# Altium PCB iotv4.PcbDoc
Units mm, origin at the board's own origin, x right, y up, seen from the top; angles counter-clockwise.
Board outline 151 x 86.38 mm, 2 copper layers (Top Layer, Bottom Layer); 125 components, 112 nets, 435 pads, 0 vias.
Unrouted connection lines stored in the file: 10.
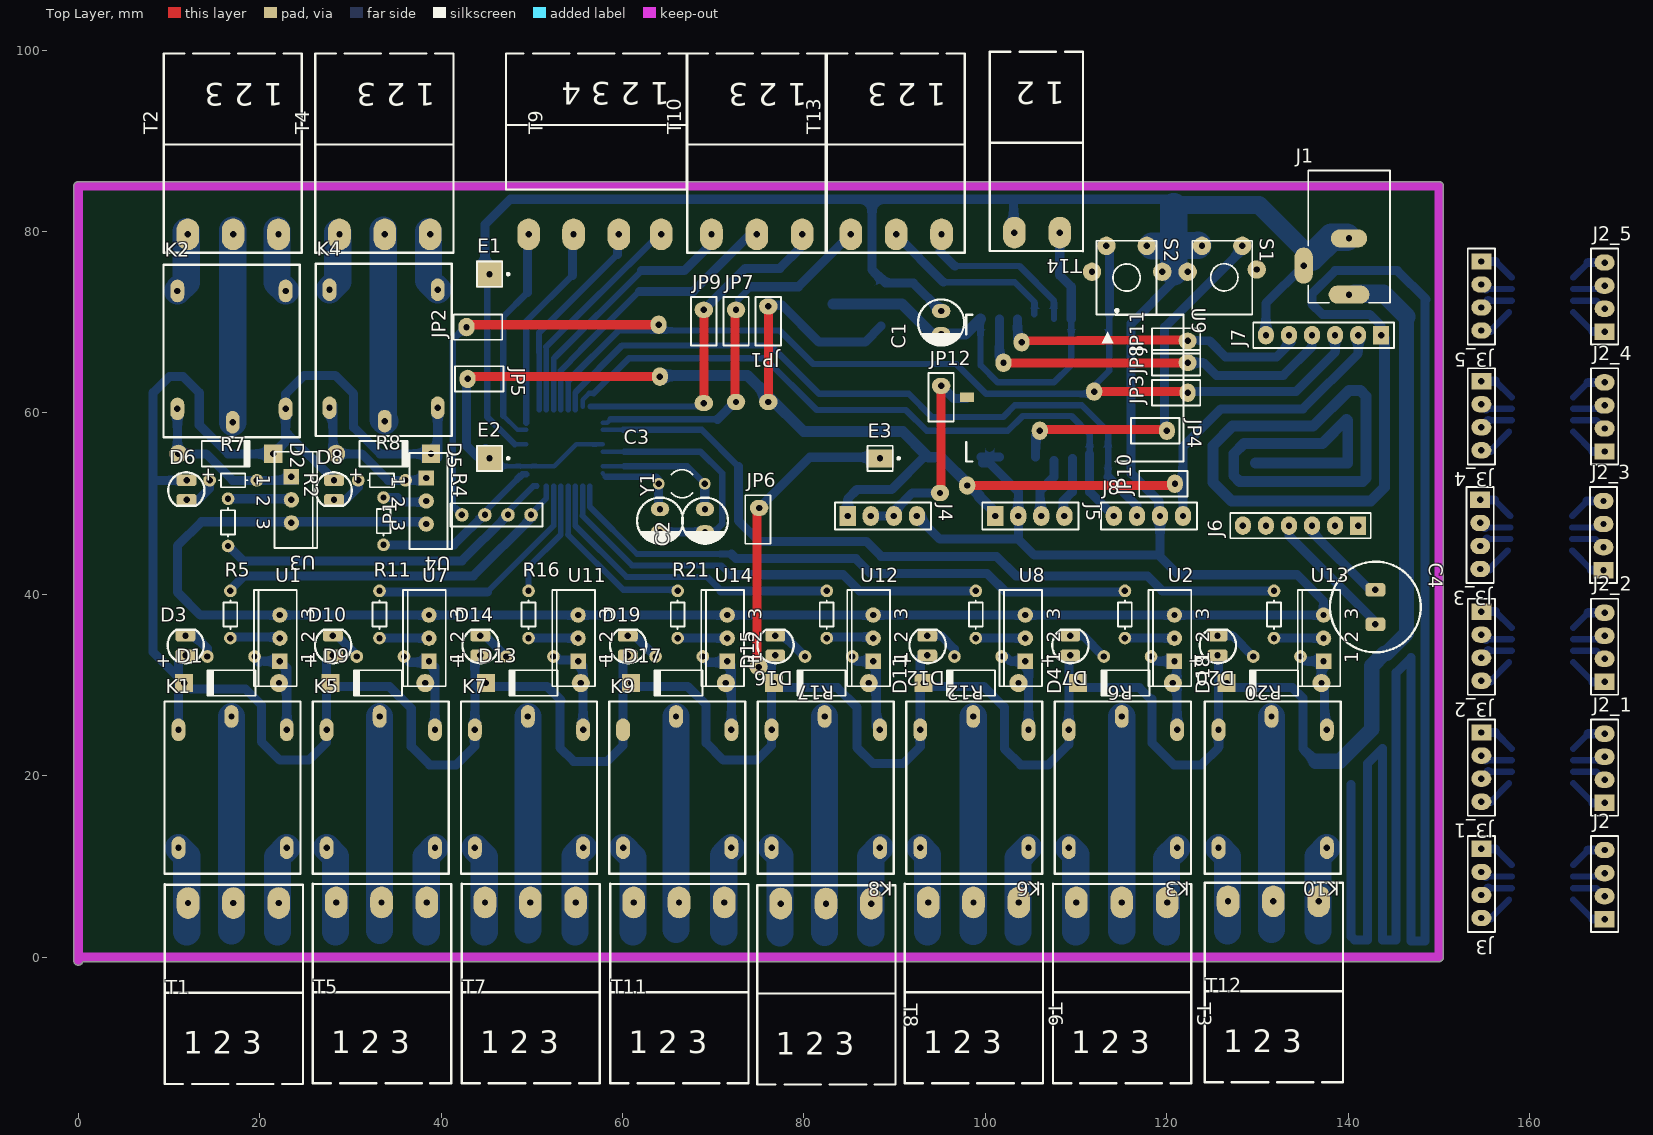
[diagram p0: Top Layer view]
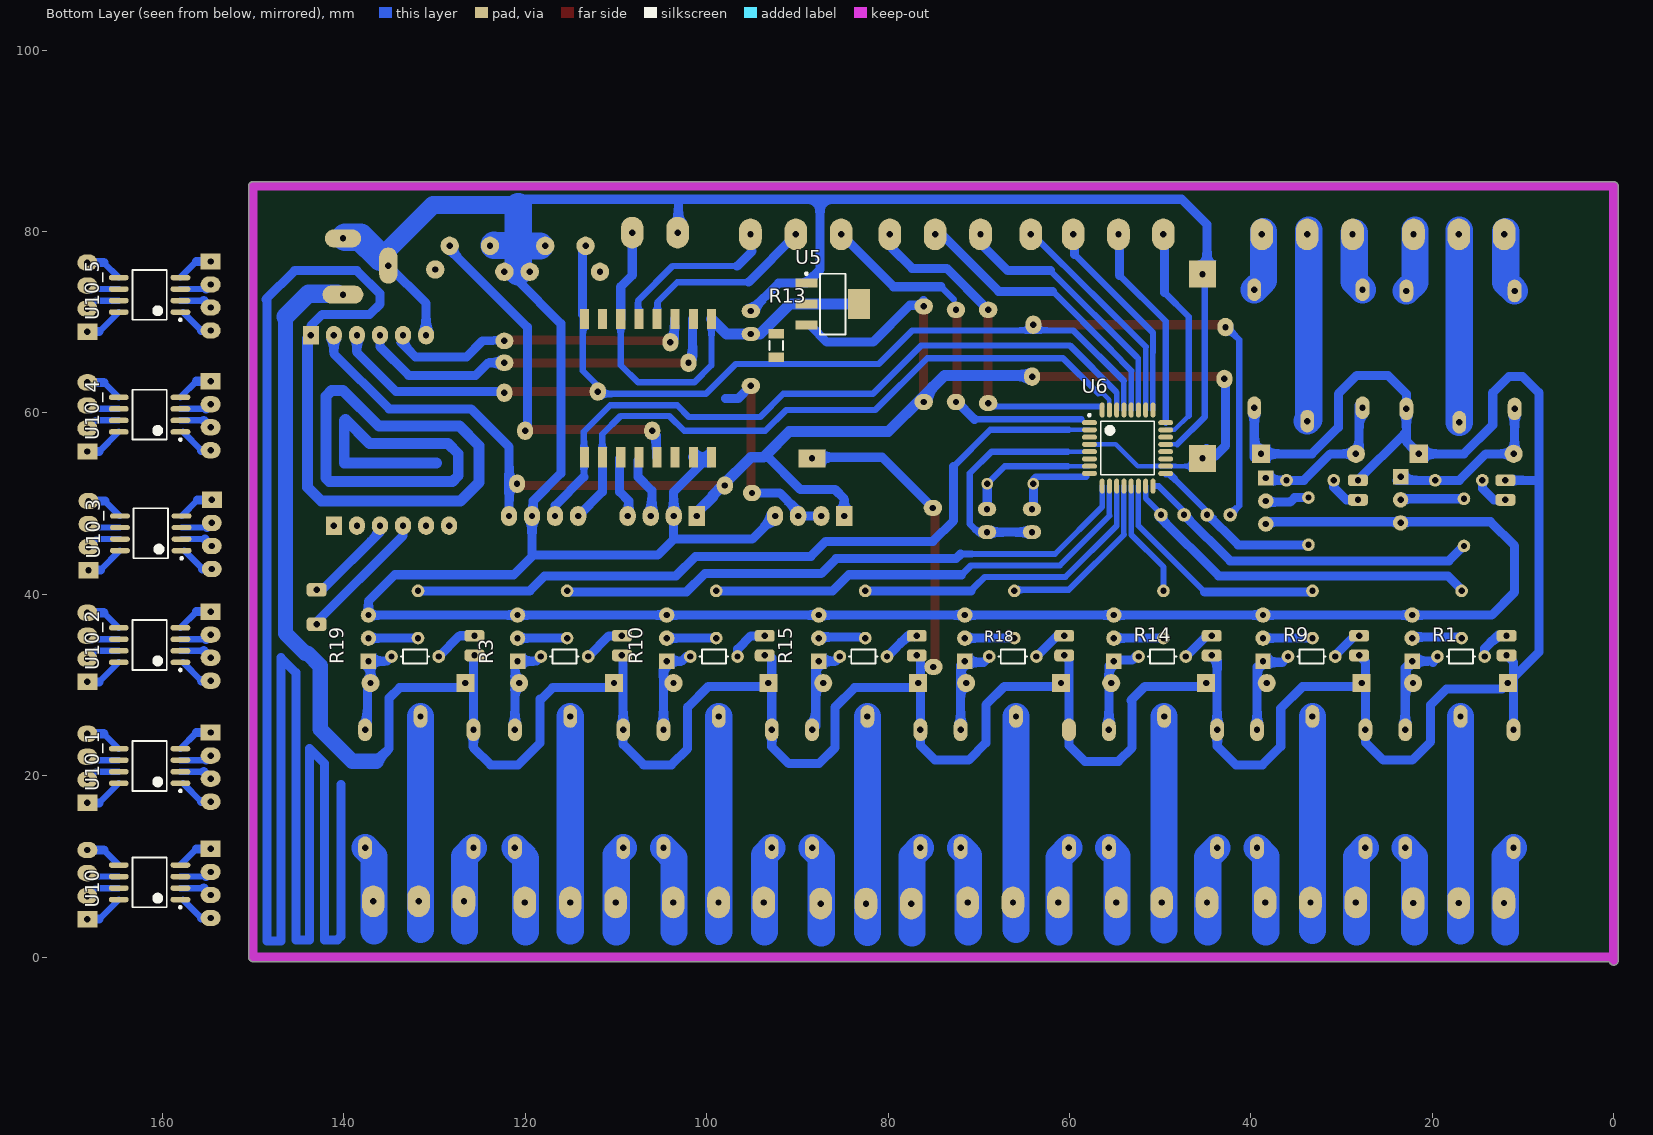
[diagram p1: Bottom Layer view, seen from below]

## Layer stack, top to bottom
Top Solder: solder mask 0.0102, Solder Resist, Dk 3.5
Top Layer: signal copper 0.0356
Dielectric 1: dielectric 0.32, FR-4, Dk 4.8
Bottom Layer: signal copper 0.0356
Bottom Solder: solder mask 0.0102, Solder Resist, Dk 3.5

## Board outline
-0.5,-0.381 -0.5,85 cw(c0,85) 0,85.5 150,85.5 cw(c150,85) 150.5,85 150.5,0 cw(c150,0) 150,-0.5 0.486,-0.5 cw(c0,-0.381)

## Design rules (kind name [scope] priority, off if disabled: settings)
Clearance Clearance_1 [InPolygon] p1: gap=0.8 ignorepadtopadclearanceinfootprint=FALSE
Clearance [All] p2: gap=0.254 ignorepadtopadclearanceinfootprint=FALSE except(0: Arc-Hole Track-Hole SMDPad-Hole THPad-Hole Via-Hole Fill-Hole Poly-Hole Region-Hole Text-Hole)
PolygonConnect [All] p1: connectstyle=Relief reliefconductorwidth=0.254 reliefentries=4 polygonreliefangle="90 Angle" airgapwidth=0.254
RoomDefinition iotv4 [InComponentClass('iotv4')] p1: confinementstyle=ConfineIn formatcopy=TRUE lockcomponents=FALSE outline 144.907,-4.953 247.904,-4.953 247.904,23.114 144.907,23.114
RoutingLayers [All] p1: top layer_v5=FALSE bottom layer_v5=TRUE
RoutingVias [All] p1: holewidth=0.711 width=2.5 viastyle="Through Hole" minholewidth=0.711 minwidth=1.27 maxholewidth=0.711 maxwidth=2
SolderMaskExpansion [All] p1: expansion=0.102
Width [All] p1: maxlimit=3 minlimit=0.5 preferedwidth=1
29 further rules are at their usual default settings.

## Classes and differential pairs
component class iotv4: C1 C2 C3 C4 D1 D2 D3 D4 D5 D6 D7 D8 D9 D10 D11 D12 D13 D14 D15 D16 D17 D18 D19 D20 D21 D22 D23 E1 E2 E3 J1 J4 J5 J6 J7 J8 JP1 JP2 JP3 JP4 JP5 JP6 JP7 JP8 JP9 JP10 JP11 JP12 JP? K1 K2 K3 K4 K5 K6 K7 K8 K9 K10 P1 P5 P7 R1 R2 R3 R4 R5 R6 R7 R8 R9 R10 R11 R12 R13 R14 R15 R16 R17 R18 R19 R20 R21 R22 S1 S2 T1 T2 T3 T4 T5 T6 T7 T8 T9 T10 T11 T12 T13 T14 U1 U2 U3 U4 U5 U6 U7 U8 U9 U10 U11 U12 U13 U14 U17 Y1

## Components (designator, comment, footprint, x,y, rotation, side; value= is the part's Value field where it differs from the comment)
C1 "Value" ELEC-CAP-RAD10-20 95.123,69.977 r90 top
C2 "Value" ELEC-CAP-RAD10-20 69.088,48.133 r90 top
C3 "Value" ELEC-CAP-RAD10-20 64.135,48.133 r90 top
C4 "mic" HS1101 143.002,38.611 r270 top
D1 "Diode 1N4007" DO-41 16.891,30.226 r180 top
D2 "Diode 1N4007" DO-41 16.256,55.499 r0 top
D3 "LED 3mm" LED-3mm 11.938,34.29 r180 top
D4 "Diode 1N4007" DO-41 115.443,30.226 r180 top
D5 "Diode 1N4007" DO-41 33.655,55.499 r0 top
D6 "LED 3mm" LED-3mm 11.811,51.562 r0 top
D7 "LED 3mm" LED-3mm 109.474,34.29 r180 top
D8 "LED 3mm" LED-3mm 28.067,51.562 r0 top
D9 "Diode 1N4007" DO-41 33.02,30.226 r180 top
D10 "LED 3mm" LED-3mm 28.194,34.29 r180 top
D11 "Diode 1N4007" DO-41 98.425,30.226 r180 top
D12 "LED 3mm" LED-3mm 93.726,34.29 r180 top
D13 "Diode 1N4007" DO-41 50.165,30.226 r180 top
D14 "LED 3mm" LED-3mm 44.45,34.29 r180 top
D15 "Diode 1N4007" DO-41 81.915,30.226 r180 top
D16 "LED 3mm" LED-3mm 76.962,34.29 r180 top
D17 "Diode 1N4007" DO-41 66.167,30.226 r180 top
D18 "Diode 1N4007" DO-41 131.826,30.226 r180 top
D19 "LED 3mm" LED-3mm 60.706,34.29 r180 top
D20 "LED 3mm" LED-3mm 125.73,34.29 r180 top
E1 "Antenna" PIN1#1 45.339,75.311 r270 top
E2 "Antenna" PIN1#1 45.339,54.991 r270 top
E3 "Antenna" PIN1#2 88.392,54.991 r270 top
J1 "PWR2.5" KLD-0202 140.097,86.748 r270 top
J2 "Header4X1" "HEADER 4X1"#1 168.275,4.191 r90 top
J2_1 "Header4X1" "HEADER 4X1"#1 168.275,17.018 r90 top (schematic designator J2)
J2_2 "Header4X1" "HEADER 4X1"#1 168.275,30.353 r90 top (schematic designator J2)
J2_3 "Header4X1" "HEADER 4X1"#1 168.148,42.672 r90 top (schematic designator J2)
J2_4 "Header4X1" "HEADER 4X1"#1 168.275,55.753 r90 top (schematic designator J2)
J2_5 "Header4X1" "HEADER 4X1"#1 168.275,68.961 r90 top (schematic designator J2)
J3 "Header4X1" "HEADER 4X1"#1 154.686,11.938 r270 top
J3_1 "Header4X1" "HEADER 4X1"#1 154.686,24.765 r270 top (schematic designator J3)
J3_2 "Header4X1" "HEADER 4X1"#1 154.686,38.1 r270 top (schematic designator J3)
J3_3 "Header4X1" "HEADER 4X1"#1 154.559,50.419 r270 top (schematic designator J3)
J3_4 "Header4X1" "HEADER 4X1"#1 154.686,63.5 r270 top (schematic designator J3)
J3_5 "Header4X1" "HEADER 4X1"#1 154.686,76.708 r270 top (schematic designator J3)
J4 "Header4X1" "HEADER 4X1"#1 84.836,48.641 r0 top
J5 "Header4X1" "HEADER 4X1"#1 101.092,48.641 r0 top
J6 "Header6X1" "HEADER 6X1" 141.097,47.58 r180 top
J7 "Header6X1" "HEADER 6X1" 143.637,68.58 r180 top
J8 "Header4X1" "HEADER 4X1"#2 114.173,48.641 r0 top
JP1 "Jumper" "Header 2X1"#1 76.073,70.104 r270 top
JP2 "Jumper" "Header 2X1"#2 44.069,69.469 r180 top
JP3 "Jumper" "Header 2X1"#3 121.031,62.23 r180 top
JP4 "Jumper" "Header 2X1"#4 118.745,58.039 r0 top
JP5 "Jumper" "Header 2X1"#5 44.196,63.754 r0 top
JP6 "Jumper" "Header 2X1"#6 74.93,48.26 r90 top
JP7 "Jumper" "Header 2X1"#7 72.517,70.104 r90 top
JP8 "Jumper" "Header 2X1"#8 121.031,65.532 r180 top
JP9 "Jumper" "Header 2X1"#9 68.961,70.104 r90 top
JP10 "Jumper" "Header 2X1"#10 119.634,52.197 r180 top
JP11 "Jumper" "Header 2X1"#11 121.031,67.945 r180 top
JP12 "Jumper" "Header 2X1"#12 95.123,61.722 r90 top
K1 "Relay-12vDC" Relays#1 24.501,28.194 r180 top
K2 "Relay-12vDC" Relays#1 9.398,57.325 r0 top
K3 "Relay-12vDC" Relays#1 122.665,28.194 r180 top
K4 "Relay-12vDC" Relays#1 26.162,57.452 r0 top
K5 "Relay-12vDC" Relays#1 40.842,28.194 r180 top
K6 "Relay-12vDC" Relays#1 106.282,28.194 r180 top
K7 "Relay-12vDC" Relays#1 57.182,28.194 r180 top
K8 "Relay-12vDC" Relays#1 89.899,28.194 r180 top
K9 "Relay-12vDC" Relays#2 73.523,28.194 r180 top
K10 "Relay-12vDC" Relays#1 139.175,28.194 r180 top
P1 "Header 4" HDR1X4 49.911,48.768 r180 top
R1 "Res2" Res50 18.034,33.147 r0 bottom value=1K
R2 "Res2" Res50 18.288,52.578 r0 top value=1K
R3 "Res2" Res50 116.876,33.147 r0 bottom value=1K
R4 "Res2" Res50 34.671,52.578 r0 top value=1K
R5 "Res2" Res50 16.764,36.576 r270 top value=1K
R6 "Res2" Res50 115.389,36.576 r270 top
R7 "Res2" Res50 16.51,49.149 r90 top
R8 "Res2" Res50 33.655,49.276 r90 top
R9 "Res2" Res50 34.508,33.147 r0 bottom value=1K
R10 "Res2" Res50 100.403,33.147 r0 bottom value=1K
R11 "Res2" Res50 33.201,36.576 r270 top value=1K
R12 "Res2" Res50 98.951,36.576 r270 top
R13 "10K" "RES 1206 (3216X08L)" 92.329,67.437 r90 bottom
R14 "Res2" Res50 50.981,33.147 r0 bottom value=1K
R15 "Res2" Res50 83.929,33.147 r0 bottom value=1K
R16 "Res2" Res50 49.639,36.576 r270 top value=1K
R17 "Res2" Res50 82.514,36.576 r270 top value=1K
R18 "Res2" Res50 67.455,33.147 r0 bottom value=1K
R19 "Res2" Res50 133.35,33.147 r0 bottom value=1K
R20 "Res2" Res50 131.826,36.576 r270 top
R21 "Res2" Res50 66.076,36.576 r270 top
S1 "PUSH BUTTON DOUBLE" "PUSH BUTTON"#1 126.111,74.93 r270 top
S2 "PUSH BUTTON DOUBLE" "PUSH BUTTON"#2 115.57,74.93 r270 top
T1 "Terminal" "phoenix terminal R 3" 9.525,-13.97 r0 top
T2 "Terminal" "phoenix terminal R 3" 24.645,99.631 r180 top
T3 "Terminal" "phoenix terminal R 3" 107.465,-13.906 r0 top
T4 "Terminal" "phoenix terminal R 3" 41.362,99.631 r180 top
T5 "Terminal" "phoenix terminal R 3" 25.86,-13.906 r0 top
T6 "Terminal" "phoenix terminal R 3" 91.115,-13.906 r0 top
T7 "Terminal" "phoenix terminal R 3" 42.258,-13.906 r0 top
T8 "Terminal" "phoenix terminal R 3" 74.859,-14.033 r0 top
T9 "Phoenix terminal" "phoenix terminal 4" 67.089,99.631 r180 top
T10 "Terminal" "phoenix terminal R 3" 82.376,99.631 r180 top
T11 "Terminal" "phoenix terminal R 3" 58.657,-13.906 r0 top
T12 "Terminal" "phoenix terminal R 3" 124.182,-13.779 r0 top
T13 "Terminal" "phoenix terminal R 3" 97.743,99.631 r180 top
T14 "Terminal" "phoenix terminal R 2" 110.777,99.822 r180 top
U1 "L4931CV30" TO-220A 22.225,35.179 r90 top
U2 "L4931CV30" TO-220A 120.85,35.179 r90 top
U3 "L4931CV30" TO-220A 23.495,50.419 r270 top
U4 "L4931CV30" TO-220A 38.354,50.292 r270 top
U5 "LM1117MP-3.3" MP04A_N 86.106,72.009 r180 bottom
U6 "ATmega8-16AC" 32A_N 53.594,56.134 r180 bottom
U7 "L4931CV30" TO-220A 38.662,35.179 r90 top
U8 "L4931CV30" TO-220A 104.412,35.179 r90 top
U9 "ESP_12_E" ESP_12_E 113.474,70.733 r270 top
U10 "ATtiny15L-1SC" 8S2_N 161.417,8.255 r0 bottom
U10_1 "ATtiny15L-1SC" 8S2_N 161.417,21.082 r0 bottom (schematic designator U10)
U10_2 "ATtiny15L-1SC" 8S2_N 161.417,34.417 r0 bottom (schematic designator U10)
U10_3 "ATtiny15L-1SC" 8S2_N 161.29,46.736 r0 bottom (schematic designator U10)
U10_4 "ATtiny15L-1SC" 8S2_N 161.417,59.817 r0 bottom (schematic designator U10)
U10_5 "ATtiny15L-1SC" 8S2_N 161.417,73.025 r0 bottom (schematic designator U10)
U11 "L4931CV30" TO-220A 55.1,35.179 r90 top
U12 "L4931CV30" TO-220A 87.63,35.179 r90 top
U13 "L4931CV30" TO-220A 137.287,35.179 r90 top
U14 "L4931CV30" TO-220A 71.537,35.179 r90 top
Y1 "XTAL" R38 66.548,52.197 r90 top

## Footprints (in the part's own frame and the unit in brackets; to place one, negate y for a bottom-side part, rotate by r counter-clockwise, add the part's x,y. Pads: shape width x height; smd on the part's side, far side on the other; paste and mask are expansions set on the pad)
8S2_N [mm] "SOP, 8-Leads, Body 5.3x5.3mm, Pitch 1.27mm, IPC Medium Density"
  oval 2.2x0.6 smd: 1(-3.4,1.905) 2(-3.4,0.635) 3(-3.4,-0.635) 4(-3.4,-1.905) 5(3.4,-1.905) 6(3.4,-0.635) 7(3.4,0.635) 8(3.4,1.905)
  silkscreen extent -3.52,-2.75 1.9,2.88, body extent -2.73,-2.75 2.73,2.75, height 2.16
32A_N [mm] "Thin QFP, 32-Leads, Body 7x7mm, Pitch 0.8mm, IPC Medium Density"
  oval 1.65x0.55 smd: 1(-4.2,2.8) 2(-4.2,2) 3(-4.2,1.2) 4(-4.2,0.4) 5(-4.2,-0.4) 6(-4.2,-1.2) 7(-4.2,-2) 8(-4.2,-2.8) 17(4.2,-2.8) 18(4.2,-2) 19(4.2,-1.2) 20(4.2,-0.4) 21(4.2,0.4) 22(4.2,1.2) 23(4.2,2) 24(4.2,2.8)
  oval 0.55x1.65 smd: 9(-2.8,-4.2) 10(-2,-4.2) 11(-1.2,-4.2) 12(-0.4,-4.2) 13(0.4,-4.2) 14(1.2,-4.2) 15(2,-4.2) 16(2.8,-4.2) 25(2.8,4.2) 26(2,4.2) 27(1.2,4.2) 28(0.4,4.2) 29(-0.4,4.2) 30(-1.2,4.2) 31(-2,4.2) 32(-2.8,4.2)
  silkscreen extent -4.33,-2.95 2.95,3.75, body extent -3.5,-3.5 3.5,3.5, height 1.2
DO-41 [mm] "Diode, Axial; Body 5.2 x 2.7 mm (LxDia. max), Lead Dia. 0.86 mm (max)"
  round 2 hole 0.7: 1(-5.23,0)
  rect 2x2 hole 0.7: 2(5.23,0)
  silkscreen extent -2.65,-1.4 2.75,1.4
ELEC-CAP-RAD10-20 [mil]
  oval 60x80 hole 27.56: 1(-50,0) 2(50,0)
  silkscreen extent -100,-100 100,100, body extent -124,-124 124,124, height 404
ESP_12_E [mm] "ESP-12 Wi-Fi Module by AI-Thinker"
  rect 2.25x1 smd far side: 1(0.375,0) 2(0.375,-2) 3(0.375,-4) 4(0.375,-6) 5(0.375,-8) 6(0.375,-10) 7(0.375,-12) 8(0.375,-14) 15(15.625,-14) 16(15.625,-12) 17(15.625,-10) 18(15.625,-8) 19(15.625,-6) 20(15.625,-4) 21(15.625,-2) 22(15.625,0)
  rect 1x1.5 smd: 12(9,-15.5)
  silkscreen extent -0.7,-15.57 16.08,8.37, body extent 0,-15.49 16,8.51, height 2.75
HDR1X4 [mm] "Connector; Header; 4 Position"
  round 1.5 hole 0.7: 1(0,0) 2(2.54,0) 3(5.08,0) 4(7.62,0)
  silkscreen extent -1.27,-1.27 8.89,1.27
"Header 2X1"#1 [mil]
  oval 70x80 hole 27.56: 1(-65,0) 2(350,0)
  silkscreen extent -105,-55 105,55, body extent -100,-50 100,50, height 374
"Header 2X1"#2 [mil]
  oval 70x80 hole 27.56: 1(-784.06,-10) 2(50,0)
  silkscreen extent -105,-55 105,55, body extent -100,-50 100,50, height 374
"Header 2X1"#3 [mil]
  oval 70x80 hole 27.56: 1(-50,0) 2(355.55,-5)
  silkscreen extent -105,-55 105,55, body extent -100,-50 100,50, height 374
"Header 2X1"#4 [mil]
  oval 70x80 hole 27.56: 1(-501.77,0) 2(50,0)
  silkscreen extent -105,-55 105,55, body extent -100,-50 100,50, height 374
"Header 2X1"#5 [mil]
  oval 70x80 hole 27.56: 1(-50,0) 2(784.06,10)
  silkscreen extent -105,-55 105,55, body extent -100,-50 100,50, height 374
"Header 2X1"#6 [mil]
  oval 70x80 hole 27.56: 1(-640.16,-2.76) 2(50,-5)
  silkscreen extent -105,-55 105,55, body extent -100,-50 100,50, height 374
"Header 2X1"#7 [mil]
  oval 70x80 hole 27.56: 1(-350,0) 2(50,0)
  silkscreen extent -105,-55 105,55, body extent -100,-50 100,50, height 374
"Header 2X1"#8 [mil]
  oval 78.74x70.87 hole 27.56: 1(-50,0)
  oval 70x80 hole 27.56: 2(749.25,0)
  silkscreen extent -105,-55 105,55, body extent -100,-50 100,50, height 374
"Header 2X1"#9 [mil]
  oval 70x80 hole 27.56: 1(-355,0) 2(50,0)
  silkscreen extent -105,-55 105,55, body extent -100,-50 100,50, height 374
"Header 2X1"#10 [mil]
  oval 70x80 hole 27.56: 1(-50,0) 2(851.73,7.76)
  silkscreen extent -105,-55 105,55, body extent -100,-50 100,50, height 374
"Header 2X1"#11 [mil]
  oval 78.74x70.87 hole 27.56: 1(-50,0)
  oval 70x80 hole 27.56: 2(670.51,5.71)
  silkscreen extent -105,-55 105,55, body extent -100,-50 100,50, height 374
"Header 2X1"#12 [mil]
  oval 70x80 hole 27.56: 1(-415,5) 2(50,0)
  silkscreen extent -105,-55 105,55, body extent -100,-50 100,50, height 374
"HEADER 4X1"#1 [mm]
  rect 1.8x2.2 hole 0.7: 1(0,0)
  oval 1.8x2.2 hole 0.7: 2(2.54,0) 3(5.08,0) 4(7.62,0)
  silkscreen extent -1.43,-1.5 9.18,1.5, body extent -1.19,-1.22 8.97,1.32, height 8.38
"HEADER 4X1"#2 [mm]
  oval 1.8x2.2 hole 0.7: 1(0,0) 2(2.54,0) 3(5.08,0) 4(7.62,0)
  silkscreen extent -1.43,-1.5 9.18,1.5, body extent -1.19,-1.22 8.97,1.32, height 8.38
"HEADER 6X1" [mil]
  rect 70x80 hole 27.56: 1(0,0)
  oval 70x80 hole 27.56: 2(100,0) 3(200,0) 4(300,0) 5(400,0) 6(500,0)
  silkscreen extent -55,-55 555,55, body extent -52,-49 548,51, height 330
HS1101 [mm] "HUMIDITY SENSOR"
  rrect50% 1.5x2.2 hole 0.7: 1(1.908,0) 2(-1.892,0)
  silkscreen extent -5,-5 5,5
KLD-0202 [mm] "DC Power Jack, 2.5mm, KLD Series, PCB Mount"
  oval 2x4.5 hole 0.7: 1(13.7,0)
  round 1.5 all layers, no hole: 1A(13.7,-1.25) 1B(13.7,1.25) 2A(7.5,-1) 2B(7.5,1) 3A(9.5,-5) 3B(11.5,-5)
  oval 2x4 hole 0.7: 2(7.5,0)
  oval 4x2 hole 0.7: 3(10.5,-5)
  silkscreen extent 0,-4.5 14.6,4.5
LED-3mm [mm] "LED; 2 Leads"
  rrect50% 2.2x1.3 hole 0.7: 1(0.127,1.016) 2(0.127,-1.143)
  silkscreen extent -1.9,-1.81 2.09,1.89
MP04A_N [mm] "SOT223, 4-Leads, Body 6.5x3.5mm, Pitch 2.3mm, Lead Span 7mm, IPC Medium Density"
  rect 2.4x1 smd: 1(-2.9,2.3) 2(-2.9,0) 3(-2.9,-2.3)
  rect 2.4x3.3 smd: 4(2.9,0)
  silkscreen extent -3.03,-3.35 1.4,3.47, body extent -1.85,-3.35 1.85,3.35, height 1.8
"phoenix terminal 4" [mm] "4 terminals"
  oval 2.5x3.5 hole 0.7: 1(2.827,19.939) 2(7.493,19.939) 3(12.493,19.939) 4(17.446,19.939)
  silkscreen extent 0,0 19.94,15
"phoenix terminal R 2" [mm] "2 Right terminals"
  oval 2.5x3.5 hole 0.7: 1(2.573,19.939) 2(7.573,19.939)
  silkscreen extent 0,0 10.29,22
"phoenix terminal R 3" [mm] "3 Right terminals"
  oval 2.5x3.5 hole 0.7: 1(2.573,19.939) 2(7.573,19.939) 3(12.573,19.939)
  silkscreen extent 0,0 15.24,22
PIN1#1 [mm] "Generic Antenna; 1 Lead"
  rect 3x3 hole 0.7: 1(0,0)
  silkscreen extent -1.4,-1.4 1.4,2.18
PIN1#2 [mm] "Generic Antenna; 1 Lead"
  rect 2x3 hole 0.7: 1(0,0)
  silkscreen extent -1.4,-1.4 1.4,2.18
"PUSH BUTTON"#1 [mil]
  round 80 hole 27.56: 1(-137.5,87.5) 2(-35,150) 3(-137.5,-87.5) 4(-25,-150)
  silkscreen extent -160,-130 160,130, body extent -155,-121 157,123, height 205
"PUSH BUTTON"#2 [mil]
  round 80 hole 27.56: 1(-137.5,87.5) 2(-25,155) 3(-137.5,-87.5) 4(-25,-150)
  silkscreen extent -160,-130 160,130, body extent -155,-121 157,123, height 205
R38 [mm] "Crystal, Thru-Hole; 2 Leads; Body 3.1 x 8.2 mm (Dia.xH)"
  round 1.3 hole 0.7: 1(0,2.566) 2(0,-2.514)
  silkscreen extent -1.55,-1.19 1.55,1.17
Relays#1 [mil]
  oval 60x98.43 hole 27.56: 1(300,65) 2(60,635) 3(530,635) 4(60,123.11) 5(530,123.11)
  silkscreen extent 0,0 591,748
Relays#2 [mil]
  oval 60x98.43 hole 27.56: 1(300,65) 2(60,635) 3(530,635) 4(60,123.11)
  oval 60x98.43 all layers, no hole: 5(530,123.11)
  silkscreen extent 0,0 591,748
Res50 [mm] "50mm Pin Spacing"
  round 1.4 hole 0.7: 1(-3.81,0) 2(1.397,0)
  silkscreen extent -2.77,-0.76 0.38,0.76
"RES 1206 (3216X08L)" [mm] "Chip Resistor, 2-Leads, Body 3.2x1.6mm, IPC High Density _ (0.125 W)"
  rect 1.05x1.7 smd: 1(-1.295,0) 2(1.301,0)
  silkscreen extent -0.5,-0.75 0.5,0.75, body extent -1.52,-0.76 1.53,0.76, height 0.6
TO-220A [mm] "TO, Thru-Hole, Vertical, Heatsink Mounted; 3 In-Line Leads; Pitch 2.54 mm"
  rect 1.7x1.7 hole 0.7: 1(-2.54,0)
  round 1.7 hole 0.7: 2(0,0) 3(2.54,0)
  silkscreen extent -5.3,-1.85 5.3,2.85

## Part data
C1 C2 C3: library part "Capacitor Electrolytic", "Electrolytic Capacitor"
C4: library part HS1101, "RELATIVE HUMIDITY SENSOR", ComponentLinkURL=www.picpars.com, Designer="Seyed Mohsen Ghasemain", E-mail=picpars@gmail.com
D1 D2 D4 D5 D9 D11 D13 D15 D17 D18: "1 Amp General Purpose Rectifier", Code_JEDEC=DO-204-AL, ComponentLink1Description="Manufacturer Link", ComponentLink1URL=http://www.fairchildsemi.com/, ComponentLink2Description=Datasheet, ComponentLink2URL=http://www.fairchildsemi.com/ds/1N%2F1N4001.pdf, DatasheetVersion=1998, LatestRevisionDate=17-Jul-2002, LatestRevisionNote="Re-released for DXP Platform.", PackageDescription="Diode, Axial; Body 5.2 x 2.7 mm (LxDia. max), Lead Dia. 0.86 mm (max)", PackageReference=DO-41, PackageVersion=Aug-1999, Published=8-Jun-2000, Publisher="Altium Limited"
D3 D6 D7 D8 D10 D12 D14 D16 D19 D20: "Typical LED", Designer="Seyed Mohsen Ghasemian", PackageDescription="LED; 2 Leads", PackageReference=LED, Published=02/04/2012, Publisher=www.picpars.com
E1 E2 E3: "Generic Antenna", LatestRevisionDate=17-Jul-2002, LatestRevisionNote="Re-released for DXP Platform.", PackageReference=PIN1, Published=24-Mar-1999, Publisher="Altium Limited"
J1: "Low Voltage Power Supply Connector", ComponentLink1Description="Manufacturer Link", ComponentLink1URL=http://domino.kycon.com/internet/Products.html, DatasheetDocument=09-May-2002, Published=17-Dec-2003, Publisher="Altium Limited"
K1 K2 K3 K4 K5 K6 K7 K8 K9 K10: library part Relay-05vDC, "Relay-05vDC-240AC 5A", ComponentLinkURL=www.picpars.com, Designer="Seyed Mohsen Ghasemain"
P1: "Header, 4-Pin", LatestRevisionDate=17-Jul-2002, LatestRevisionNote="Re-released for DXP Platform.", Publisher="Altium Limited"
R1 R2 R3 R4 R5 R6 R7 R8 R9 R10 R11 R12 R14 R15 R16 R17 R18 R19 R20 R21: "Resistor", LatestRevisionDate=17-Jul-2002, LatestRevisionNote="Re-released for DXP Platform.", PackageDescription="Axial Device, Thru-Hole; 2 Leads; 0.4 in Pin Spacing", Published=8-Jun-2000, Publisher="Altium Limited"
  R1 R2 R3 R4 R5 R6 R7 R8 R9 R10 R11 R12 R15 R16 R17 R18 R19 R20 R21: PackageReference=AXIAL-0.4
  R14: PackageReference=Res50
R13: library part Resistor, "Resistor", Power="1/4 W", Tolerance=5%
S1 S2: "Switch"
T1 T2 T3 T4 T5 T6 T7 T8 T11 T12: library part "Terminal 1*3", "phoenix terminal R 3", ComponentLinkURL=www.picpars.com, Designer="Seyed Mohsen Ghasemain", E-mail=picpars@gmail.com
T9: library part "Phoenix terminal 4", "Terminal 4 Pin", ComponentLinkURL=www.picpars.com, Designer="Seyed Mohsen Ghasemain", E-mail=picpars@gmail.com
T10 T13: library part "Terminal 1*3", "Terminal 3 Pin 250VAC 16A", ComponentLinkURL=www.picpars.com, Designer="Seyed Mohsen Ghasemain", E-mail=picpars@gmail.com
T14: library part "Terminal 1*2", "Terminal 2 Pin 250VAC 16A", ComponentLinkURL=www.picpars.com, Designer="Seyed Mohsen Ghasemain", E-mail=picpars@gmail.com
U1 U2 U3 U4 U7 U8 U11 U12 U13 U14: "250mA, Very Low Drop ( 0.4V) Voltage Regulator", ComponentLink1Description="Manufacturer Link", ComponentLink1URL=http://www.st.com/, ComponentLink2Description=Datasheet, ComponentLink2URL=http://www.st.com/stonline/products/literature/ds/4340/l4931abxx15.pdf, DatasheetVersion=Apr-1999, LatestRevisionDate=06-Jun-2005, LatestRevisionNote="PCB Pin sequence re-ordered.", PackageDescription="TO, Thru-Hole, Vertical, Heatsink Mounted; 3 In-Line Leads; Pitch 2.54 mm", PackageReference=TO-220A, PackageVersion=Jul-2004, Published=24-Aug-2001, Publisher="Altium Limited"
U5: "800mA Low-Dropout Linear Regulator", DigiKeyPartNumber=LM1117MP-3.3CT-ND, Manufacturer="National Semiconductor", PackageTopMarking=XYTT*N05A, PowerWise=N, Code_IPC=SOT223-4, Code_JEDEC=TO-261-AA, ComponentLink1Description="LM1117 Datasheet", ComponentLink1URL=http://www.national.com/ds/LM/LM1117.pdf, ComponentLink2Description="LM1117 Web Page", ComponentLink2URL=http://www.national.com/pf/LM/LM1117.html, ComponentLink3Description="MP04A Package Page", ComponentLink3URL=http://www.national.com/packaging/folders/mp04a.html, CompType="LDO IC", DatasheetVersion=Apr-2006, PackageDescription="Molded SOT-223, 6.50 x 3.56 x 1.6mm Body, 4 Lead, 2.3mm Pitch", PackageReference=MP04A, PackageVersion="revB, Apr-2003", PartNumber=LM1117MP-3.3, PinCount=4, Published=4-Dec-2008, Publisher="Altium Limited", RoHS=O
U6: "8-Bit AVR Microcontroller with 8K Bytes of In-System Programmable Flash Memory", Supplier Part Number 1=ATMEGA8-16AC-ND, Code_JEDEC=MS-026-ABA, ComponentLink1Description=Datasheet, ComponentLink1URL=http://www.atmel.com/dyn/resources/prod_documents/doc2486.pdf, ComponentLink2Description="Atmel.com Home", ComponentLink2URL=http://www.atmel.com, DatasheetVersion=2486H-AVR-09/02, LatestRevisionDate=16-Oct-2006, LatestRevisionNote="IPC-7351 Footprint Added.", PackageDescription="32-Lead, 7x7x1.0 mm Body, 0.8mm Lead Pitch, Thin Profile Plastic Quad Flat Package (TQFP)", PackageReference=32A, PackageVersion="revB, Oct-2001", Published=17-Sep-2003, Publisher="Altium Limited", Supplier 1=Digi-Key, Supplier 2=Mouser, Supplier Part Number 2=556-ATMEGA8-16AC
U9: "ESP-12 Wi-Fi Module by AI-Thinker", IC=ESP8266-EX, Vendor=Ai-thinker
U10 U10_1 U10_2 U10_3 U10_4 U10_5: "8-Bit AVR Microcontroller with 1K Byte of Flash Memory", Supplier Part Number 1=ATTINY15L-1SC-ND, ComponentLink1Description=Datasheet, ComponentLink1URL=http://www.atmel.com/dyn/resources/prod_documents/doc1187.pdf, ComponentLink2Description="Atmel.com Home", ComponentLink2URL=http://www.atmel.com, DatasheetVersion=1187E-AVR-06/02, LatestRevisionDate=16-Oct-2006, LatestRevisionNote="IPC-7351 Footprint Added.", PackageDescription="8-Lead, 0.208\" Body, Plastic Small Outline Package (EIAJ)", PackageReference=8S2, PackageVersion="revF, Apr-2008", Published=17-Sep-2003, Publisher="Altium Limited", Supplier 1=Digi-Key, Supplier 2=Mouser, Supplier Part Number 2=556-ATTINY15L1SC
Y1: "Crystal Oscillator", LatestRevisionDate=17-Jul-2002, LatestRevisionNote="Re-released for DXP Platform.", PackageDescription="Crystal, Thru-Hole; 2 Leads; Body 3.1 x 8.2 mm (Dia.xH)", PackageReference=R38, Published=8-Jun-2000, Publisher="Altium Limited"

## Nets (pads, with @x,y where several pads share a name; then routed paths per layer and width w, separated by ;. In a path a pad name is that pad's centre, name@x,y a point inside that pad or via, vN(x,y) a via of type N, cw(c..) or ccw(c..) an arc to the next point about the centre after c; other vN are vias at no path point)
1: J2.1 U10.1 | length 4.4
  Bottom Layer w0.7: 164.817,6.35 166.976,4.191
  Bottom Layer w1: 166.976,4.191 J2.1
2: J2.2 U10.2 | length 3.8
  Bottom Layer w0.7: 164.817,7.62 167.386,7.62 J2.2
3: J2.3 U10.3 | length 3.6
  Bottom Layer w0.7: 164.817,8.89 J2.3@167.894,8.89
  Bottom Layer w1: J2.3@167.894,8.89 J2.3
4: J2.4 U10.4 | length 4.1
  Bottom Layer w0.7: 164.817,10.16 166.468,11.811
  Bottom Layer w1: 166.468,11.811 J2.4
5: J3.1 U10.5 | length 4.1
  Bottom Layer w0.7: 156.239,11.938 158.017,10.16
  Bottom Layer w1: J3.1 156.239,11.938
6: J3.2 U10.6 | length 3.5
  Bottom Layer w0.7: J3.2@155.194,8.89 158.017,8.89
  Bottom Layer w1: J3.2 J3.2@155.194,8.89
7: J3.3 U10.7 | length 3.6
  Bottom Layer w0.7: 155.448,7.62 158.017,7.62
  Bottom Layer w1: J3.3 155.448,7.62
8: J3.4 U10.8 | length 3.9
  Bottom Layer w0.7: J3.4@155.702,4.318 157.734,6.35
  Bottom Layer w1: J3.4 J3.4@155.702,4.318
ADC: U9.2
btn: JP4.1 JP4.2 S1.1 U9.18 | length 40.9
  Top Layer w1: JP4.1@106,58.166 JP4.2@120.142,58.166
  Bottom Layer w1: U9.18@105.537,55.131 105.537,57.531 105.918,57.912 JP4.1@106,57.912 ; JP4.2@119.761,58.166 119.761,69.469 S1.1@128.524,78.232
data: J4.2 J4.3 JP12.1 JP12.2 U9.12 | length 24
  Top Layer w1: JP12.1@95.123,51.308 JP12.2
  Bottom Layer w1: J4.2 J4.3 90.043,48.768 90.043,49.276 91.948,51.181 JP12.1 ; JP12.2 96.52,61.595 97.917,61.595
dtr: J6.2
GND: C1.2 C2.1 C3.1 E1.1 J1.2 J1.2A J1.2B J1.3 J1.3A J1.3B J4.4 J5.2 J7.6 J8.3 S1.3 S1.4 S2.1 S2.2 T14.2 U1.3 U2.3 U3.3 U4.3 U5.1 U6.5 U6.21 U7.3 U8.3 U9.15 U9.16 U11.3 U12.3 U13.3 U14.3 | length 454.4
  Bottom Layer w0.5: 48.114,56.534 U6.21 ; U6.5 60.198,55.734
  Bottom Layer w0.7: E1.1 45.085,75.057 45.085,59.563 48.114,56.534 ; 60.198,55.734 68.599,55.734 70.993,53.34 70.993,47.752 70.104,46.863 C2.1
  Bottom Layer w1: U4.3 38.1,48.006 13.589,48.006 10.922,45.339 10.922,40.259 13.462,37.719 U1.3 U7.3 U11.3 U14.3 U12.3 U8.3 U2.3 U13.3@137.033,37.719 ; E1.1 44.831,75.819 44.831,80.772 47.625,83.566 87.503,83.566 ; C3.1 C2.1 ; J4.4 94.996,46.101 103.632,46.101 ; C1.2 92.061,74.309 U5.1 87.503,75.812 87.503,83.566 ; U9.15@99.538,55.131 U9.16@101.538,55.131 ; U9.15@99.695,54.496 100.444,54.496 103.632,51.308 J5.2 103.632,46.101 ; T14.2@103.124,80.137 103.124,83.566 ; 120.777,75.565 120.904,75.438 120.904,74.676 116.078,69.85 116.078,53.34 119.126,50.292 119.126,48.768 J8.3 119.253,44.45 119.126,44.323 ; 121.031,82.931 120.396,83.566 103.124,83.566 ; J7.6 130.937,72.088 J1.3 ; U13.3 137.287,39.243 134.366,42.164 121.285,42.164 119.126,44.323 ; 87.503,83.566 103.124,83.566 ; 103.632,46.101 105.41,44.323 119.126,44.323
  Bottom Layer w2: 121.031,82.931 130.175,82.931 J1.3@135.953,77.153
  Bottom Layer w3: S2.1@118.364,78.422 120.777,78.422 ; 120.777,75.565 120.777,78.422 ; 120.777,82.746 120.777,78.422 ; S1.3@123.444,78.486 120.777,78.422 ; J1.3@135.953,77.153 138.176,79.375 J1.2A@139.834,79.375
i1: T9.3 U6.24 | length 23
  Bottom Layer w0.7: U6.24 49.394,70.095 54.483,75.184 ; T9.3@54.229,79.692 T9.3@54.483,79.438
  Bottom Layer w1: 54.483,75.184 T9.3@54.483,79.438
i2: T9.2 U6.25 | length 23.1
  Bottom Layer w0.6: U6.25 50.794,66.669
  Bottom Layer w0.62: 50.794,66.669 50.794,68.828
  Bottom Layer w0.7: 50.794,68.828 59.436,77.47 ; T9.2@59.055,79.692 T9.2@59.436,79.311
  Bottom Layer w1: 59.436,77.47 T9.2@59.436,79.311
i3: T9.1 U6.26 | length 24.5
  Bottom Layer w0.6: U6.26 51.594,67.31
  Bottom Layer w0.7: 51.594,67.31 63.617,79.238 T9.1@64.234,79.375
i4: T10.3 U6.27 | length 28.6
  Bottom Layer w0.5: U6.27 U6.27@52.415,60.355
  Bottom Layer w0.6: U6.27@52.415,60.355 52.415,66.04
  Bottom Layer w0.7: 52.578,66.167 62.103,75.692 ; T10.3@69.596,78.486 T10.3@69.596,79.248
  Bottom Layer w1: 62.103,75.692 66.802,75.692 T10.3@69.596,78.486
i5: T10.2 U6.28 | length 32.3
  Bottom Layer w0.5: U6.28 U6.28@53.202,60.342
  Bottom Layer w0.6: U6.28 53.194,64.643
  Bottom Layer w0.62: 55.389,66.939 55.389,66.946
  Bottom Layer w0.7: 53.194,64.643 55.389,66.939 ; 55.389,66.946 61.849,73.406 ; T10.2@74.486,80.073 T10.2@74.739,80.073
  Bottom Layer w1: 61.849,73.406 67.818,73.406 T10.2@74.486,80.073
i6: T9.4 U6.23 | length 24.3
  Bottom Layer w0.5: 46.863,59.69 48.419,58.134 U6.23 ; T9.4@49.389,79.692 T9.4@49.53,79.551
  Bottom Layer w0.7: 46.863,59.69 46.863,70.612 49.53,73.279
  Bottom Layer w1: 49.53,73.279 T9.4@49.53,79.551
i7: JP9.1 JP9.2 T10.1 U6.32 | length 38.7
  Top Layer w1: JP9.1 JP9.2@68.961,71.12
  Bottom Layer w0.7: U6.32@56.515,60.706 JP9.1@69.469,60.706 ; T10.1@79.105,80.153 79.566,79.692 79.684,79.574 T10.1@79.756,79.502
  Bottom Layer w1: JP9.2@69.215,71.628 73.533,75.946 77.343,75.946 79.566,78.169 79.566,79.692 T10.1
i8: JP7.1 JP7.2 T13.3 U6.1 | length 41.4
  Top Layer w1: JP7.1@72.39,61.468 JP7.2@72.39,71.628
  Bottom Layer w0.5: U6.1 58.299,58.934 58.674,59.309
  Bottom Layer w0.7: 58.674,59.309 70.485,59.309 ; 72.771,72.517 74.168,73.914 ; T13.3@84.9,79.692 85.035,79.557 T13.3@85.09,79.502
  Bottom Layer w1: 70.485,59.309 JP7.1@72.453,61.277 ; 74.168,73.914 79.392,73.914 84.836,79.358 85.035,79.557 T13.3
i9: T13.1 U9.4 | length 18.5
  Bottom Layer w0.7: 94.996,77.851 T13.1@94.996,79.502 ; 96.647,76.2 103.759,76.2 107.569,72.39 U9.4@107.569,70.381
  Bottom Layer w1: 94.996,77.851 96.647,76.2
i10: T13.2 U9.5 | length 19.7
  Bottom Layer w0.7: 95.377,74.422 103.251,74.422 105.41,72.263 U9.5@105.41,70.889
  Bottom Layer w1: T13.2@90.17,79.629 95.377,74.422
led: U9.17
micn: C4.1 J6.4 | length 14.9
  Bottom Layer w1: J6.4 133.477,46.482 C4.1@143.259,36.7
micp: C4.2 J6.3 | length 9.7
  Bottom Layer w1: J6.3 136.017,46.863 C4.2@142.367,40.513
net: J7.1 | length 340.7
  Bottom Layer w1: 140.335,19.05 140.335,2.286 140.716,1.905 142.113,1.905 142.113,21.336 143.764,22.987 143.764,1.905 145.288,1.905 145.288,31.369 146.939,33.02 146.939,1.778 148.463,1.778 148.463,72.39 148.59,72.517 145.415,75.692 138.557,75.692 136.017,73.152 136.017,72.009 137.16,70.866 142.367,70.866 143.637,69.596 J7.1
  Bottom Layer w1.2: 129.794,54.483 139.954,54.483 139.954,59.182 139.827,59.309 137.16,56.642 128.524,56.642 127.381,55.499 127.381,53.086 128.016,52.451 141.605,52.451 141.986,52.832 141.986,61.849 141.351,62.484 140.081,62.484 136.144,58.547 127.254,58.547 125.095,56.388 125.095,52.324 127.127,50.292 142.494,50.292 144.018,51.816 144.018,68.199 J7.1
NetC2_2: C2.2 U6.7 Y1.2 | length 14.9
  Bottom Layer w0.5: U6.7 60.198,54.134
  Bottom Layer w0.7: 60.198,54.134 67.125,54.134 Y1.2
  Bottom Layer w1: Y1.2 69.062,49.429 C2.2
NetC3_2: C3.2 U6.8 Y1.1 | length 9.8
  Bottom Layer w0.5: U6.8 58.169,52.959 ; Y1.1 Y1.1@63.982,52.725
  Bottom Layer w0.7: 58.169,52.959 63.748,52.959 Y1.1@63.982,52.725
  Bottom Layer w1: Y1.1 63.982,49.556 C3.2
NetD1_1: D1.1 K1.4 R1.2 U1.1 | length 11.1
  Bottom Layer w1: R1.2 19.431,33.02 19.939,32.512 20.066,32.639 U1.1 22.977,31.887 K1.4
NetD2_1: D2.1 K2.4 R2.2 U3.1 | length 19
  Bottom Layer w1: D2.1@10.922,55.499 K2.4 ; D2.1 14.097,55.499 17.018,52.578 R2.2 U3.1@23.876,52.578
NetD3_2: D3.2 R1.1 | length 3.9
  Bottom Layer w1: D3.2 12.827,35.433 14.224,34.036 R1.1
NetD4_1: D4.1 K3.4 R3.2 U2.1 | length 10.5
  Bottom Layer w1: R3.2 118.781,32.639 U2.1 121.141,32.348 K3.4
NetD5_1: D5.1 K4.4 R4.2 U4.1 | length 16.3
  Bottom Layer w1: D5.1@28.067,55.753 K4.4@28.067,60.833 ; D5.1 31.242,55.499 34.163,52.578 R4.2 38.1,52.578 U4.1
NetD6_2: D6.2 R2.1 | length 4
  Bottom Layer w1: D6.2 13.208,50.419 14.478,51.689 R2.1
NetD7_2: D7.2 R3.1 | length 4.7
  Bottom Layer w1: D7.2 110.78,35.433 R3.1
NetD8_2: D8.2 R4.1 | length 4
  Bottom Layer w1: D8.2 29.464,50.419 30.861,51.816 R4.1
NetD9_1: D9.1 K5.4 R9.2 U7.1 | length 10.9
  Bottom Layer w1: R9.2 36.54,32.512 38.535,32.512 U7.1 39.318,31.984 K5.4
NetD10_2: D10.2 R9.1 | length 3.6
  Bottom Layer w1: D10.2 28.534,35.433 30.698,33.269 R9.1
NetD11_1: D11.1 K6.4 R10.2 U8.1 | length 10.5
  Bottom Layer w1: R10.2 102.235,33.147 102.743,32.639 U8.1 104.758,32.293 K6.4
NetD12_2: D12.2 R10.1 | length 4.9
  Bottom Layer w1: D12.2@93.091,35.433 D12.2 95.123,35.433 96.593,33.963 R10.1
NetD13_1: D13.1 K7.4 R14.2 U11.1 | length 10.7
  Bottom Layer w1: R14.2 52.705,33.147 53.086,32.766 54.973,32.766 U11.1 55.658,32.08 K7.4
NetD14_2: D14.2 R14.1 | length 3.8
  Bottom Layer w1: D14.2 44.885,35.433 R14.1
NetD15_1: D15.1 K8.4 R15.2 U12.1 | length 10.7
  Bottom Layer w1: R15.2 85.725,32.748 85.725,32.639 U12.1 87.975,32.639 87.975,25.467 K8.4
NetD16_2: D16.2 R15.1 | length 4.2
  Bottom Layer w1: D16.2 77.833,35.433 R15.1
NetD17_1: D17.1 K9.4 R18.2 U14.1 | length 10.8
  Bottom Layer w1: R18.2 69.469,32.53 69.469,32.512 71.41,32.512 U14.1 71.999,32.177 K9.4
NetD18_1: D18.1 K10.4 R19.2 U13.1 | length 10.7
  Bottom Layer w1: R19.2 135.255,32.639 U13.1 137.056,32.408 D18.1 137.414,29.868 137.414,25.304 K10.4
NetD19_2: D19.2 R18.1 | length 4
  Bottom Layer w1: D19.2 61.359,35.433 R18.1
NetD20_2: D20.2 R19.1 | length 4.9
  Bottom Layer w1: D20.2 127.254,35.433 R19.1
NetK1_1: K1.1 T1.2 | length 23.9
  Bottom Layer w2: 16.881,2.874 16.961,2.794 ; K1.1 K1.1@16.881,26.67
  Bottom Layer w3: 16.881,2.874 K1.1
NetK1_2: K1.2 T1.3 | length 9.8
  Bottom Layer w2: K1.2 K1.2@22.977,12.192
  Bottom Layer w3: 21.961,2.794 21.961,11.049 K1.2
NetK1_3: K1.3 T1.1 | length 9.8
  Bottom Layer w2: K1.3 K1.3@11.039,12.192
  Bottom Layer w3: K1.3 11.961,11.143 11.961,2.794
NetK2_1: K2.1 T2.2 | length 21.2
  Bottom Layer w3: K2.1 T2.2@17.018,80.137
NetK2_2: K2.2 T2.3 | length 7
  Bottom Layer w3: K2.2 11.891,74.423 T2.3@11.891,80.01
NetK2_3: K2.3 T2.1 | length 7.1
  Bottom Layer w3: T2.1@21.891,80.137 21.891,74.423 K2.3
NetK3_1: K3.1 T3.2 | length 23.8
  Bottom Layer w2: 114.965,2.794 115.045,2.874
  Bottom Layer w3: 115.045,2.874 K3.1
NetK3_2: K3.2 T3.3 | length 9.8
  Bottom Layer w3: 119.965,2.794 119.965,10.889 K3.2
NetK3_3: K3.3 T3.1 | length 9.6
  Bottom Layer w3: K3.3 109.965,11.303 109.965,2.794
NetK4_1: K4.1 T4.2 | length 21.1
  Bottom Layer w3: T4.2@33.608,80.137 33.608,59.277 K4.1
NetK4_2: K4.2 T4.3 | length 6.7
  Bottom Layer w3: K4.2 28.608,74.503 T4.3@28.608,79.883
NetK4_3: K4.3 T4.1 | length 6.8
  Bottom Layer w3: T4.1@38.608,80.01 38.608,74.597 K4.3
NetK5_1: K5.1 T5.2 | length 23.9
  Bottom Layer w2: 33.222,2.932 33.36,2.794 ; K5.1 K5.1@33.222,26.67
  Bottom Layer w3: 33.222,2.932 K5.1
NetK5_2: K5.2 T5.3 | length 9.8
  Bottom Layer w2: K5.2 K5.2@39.318,12.192
  Bottom Layer w3: 38.36,2.794 38.36,11.107 K5.2
NetK5_3: K5.3 T5.1 | length 9.8
  Bottom Layer w2: K5.3 K5.3@27.38,12.192
  Bottom Layer w3: K5.3 28.36,11.085 28.36,2.794
NetK6_1: K6.1 T6.2 | length 23.8
  Bottom Layer w2: 98.615,2.794 98.662,2.841
  Bottom Layer w3: 98.662,2.841 K6.1
NetK6_2: K6.2 T6.3 | length 9.7
  Bottom Layer w3: 103.615,2.794 103.615,10.922 K6.2
NetK6_3: K6.3 T6.1 | length 9.6
  Bottom Layer w3: K6.3 93.615,11.27 93.615,2.794
NetK7_1: K7.1 T7.2 | length 24
  Bottom Layer w2: 49.562,2.99 49.758,2.794 ; K7.1 K7.1@49.562,26.67
  Bottom Layer w3: 49.562,2.99 K7.1
NetK7_2: K7.2 T7.3 | length 9.8
  Bottom Layer w2: K7.2 K7.2@55.658,12.192
  Bottom Layer w3: 54.758,2.794 54.758,11.165 K7.2
NetK7_3: K7.3 T7.1 | length 9.8
  Bottom Layer w2: K7.3 K7.3@43.72,12.192
  Bottom Layer w3: K7.3 44.758,11.027 44.758,2.794
NetK8_1: K8.1 T8.2 | length 23.9
  Bottom Layer w2: 82.279,2.747 82.359,2.667
  Bottom Layer w3: 82.279,2.747 K8.1
NetK8_2: K8.2 T8.3 | length 9.8
  Bottom Layer w3: 87.359,2.667 87.359,11.049 K8.2
NetK8_3: K8.3 T8.1 | length 9.8
  Bottom Layer w3: K8.3 77.359,11.143 77.359,2.667
NetK9_1: K9.1 T11.2 | length 24
  Bottom Layer w2: 65.903,3.048 66.157,2.794 ; K9.1 K9.1@65.903,26.67
  Bottom Layer w3: 65.903,3.048 K9.1
NetK9_2: K9.2 T11.3 | length 9.7
  Bottom Layer w2: K9.2 K9.2@71.999,12.192
  Bottom Layer w3: 71.157,2.794 71.157,11.223 K9.2
NetK9_3: K9.3 T11.1 | length 9.9
  Bottom Layer w2: K9.3 K9.3@60.061,12.192
  Bottom Layer w3: K9.3 61.157,10.969 61.157,2.794
NetK10_1: K10.1 T12.2 | length 23.7
  Bottom Layer w2: 131.555,3.048 131.682,2.921
  Bottom Layer w3: 131.555,3.048 K10.1
NetK10_2: K10.2 T12.3 | length 9.5
  Bottom Layer w3: 136.682,2.921 136.682,11.096 K10.2
NetK10_3: K10.3 T12.1 | length 9.5
  Bottom Layer w3: K10.3 126.682,11.096 126.682,2.921
NetR5_2: R5.2 U1.2 | length 5.5
  Bottom Layer w1: R5.2@16.764,35.306 22.098,35.306 U1.2
NetR6_2: R6.2 U2.2 | length 5
  Bottom Layer w1: R6.2@115.824,35.179 U2.2
NetR7_2: R7.2 U3.2 | length 7
  Bottom Layer w1: R7.2 U3.2@23.495,50.546
NetR8_2: R8.2 U4.2 | length 5
  Bottom Layer w1: R8.2 35.179,50.673 35.687,50.165 38.227,50.165 U4.2
NetR11_2: R11.2 U7.2 | length 5.5
  Bottom Layer w1: R11.2 U7.2
NetR12_2: R12.2 U8.2 | length 5
  Bottom Layer w1: R12.2@99.441,35.179 U8.2
NetR16_2: R16.2 U11.2 | length 5.5
  Bottom Layer w1: R16.2 U11.2
NetR17_2: R17.2 U12.2 | length 4.8
  Bottom Layer w1: R17.2@83.185,35.306 87.848,35.306 U12.2@87.975,35.179
NetR20_2: R20.2 U13.2 | length 5.3
  Bottom Layer w1: R20.2@131.953,35.179 U13.2
NetR21_2: R21.2 U14.2 | length 5.2
  Bottom Layer w1: R21.2@66.294,35.179 U14.2
O1: R20.1 U6.2 | length 84.9
  Bottom Layer w0.5: U6.2 60.071,58.134
  Bottom Layer w0.7: 60.071,58.134 68.739,58.134 72.771,54.102
  Bottom Layer w1: 72.771,54.102 72.771,48.133 75.057,45.847 86.868,45.847 88.519,44.196 101.219,44.196 103.378,42.037 117.856,42.037 119.507,40.386 R20.1
O2: R6.1 U6.9 | length 65.2
  Bottom Layer w0.6: 56.394,49.651 U6.9
  Bottom Layer w0.65: 56.394,49.651 61.595,44.45
  Bottom Layer w0.7: 61.595,44.45 72.009,44.45
  Bottom Layer w1: 72.009,44.45 72.517,43.942 85.725,43.942 87.376,42.291 100.203,42.291 102.235,40.259 115.262,40.259 R6.1
O3: R12.1 U6.10 | length 50.1
  Bottom Layer w0.6: 55.594,48.673 U6.10
  Bottom Layer w0.65: 55.594,48.673 61.087,43.18
  Bottom Layer w0.7: 61.087,43.18 70.866,43.18 71.882,42.164
  Bottom Layer w1: 71.882,42.164 84.328,42.164 86.106,40.386 R12.1
o4: R17.1 U6.11 | length 35.1
  Bottom Layer w0.6: 54.794,47.568 U6.11
  Bottom Layer w0.65: 54.794,47.568 60.452,41.91
  Bottom Layer w0.7: 60.452,41.91 69.342,41.91 70.866,40.386
  Bottom Layer w1: 70.866,40.386 R17.1
o5: R21.1 U6.12 | length 20
  Bottom Layer w0.6: 53.994,46.59 U6.12
  Bottom Layer w0.65: 53.994,46.59 60.071,40.513
  Bottom Layer w0.7: 60.071,40.513 65.949,40.513 R21.1
o6: R16.1 U6.13 | length 13
  Bottom Layer w0.6: 53.194,46.59 U6.13
  Bottom Layer w0.65: R16.1 49.639,43.035 53.194,46.59
o7: R11.1 U6.14 | length 26.6
  Bottom Layer w0.6: 52.394,47.568 U6.14
  Bottom Layer w0.65: 45.085,40.259 52.394,47.568
  Bottom Layer w1: R11.1 33.328,40.259 45.085,40.259
o8: P1.1 R5.1 U6.15 | length 40.4
  Bottom Layer w0.6: 51.594,50.578 U6.15
  Bottom Layer w0.65: P1.1@50.038,49.022 51.594,50.578
  Bottom Layer w1: R5.1 16.764,40.513 18.288,42.037 43.561,42.037 P1.1@50.102,48.578
o9: P1.2 R7.1 U6.16 | length 38
  Bottom Layer w0.65: P1.2@47.498,49.276 50.156,51.934 U6.16@50.546,51.934
  Bottom Layer w0.7: P1.2@47.498,49.022 P1.2@47.498,49.276
  Bottom Layer w1: R7.1 18.161,43.688 42.291,43.688 47.18,48.578 P1.2@47.18,48.831
o10: P1.3 R8.1 U6.17 | length 19.3
  Bottom Layer w0.7: P1.3@44.958,49.022 44.958,49.276 48.937,53.255 U6.17@49.394,53.255
  Bottom Layer w1: R8.1@33.528,45.339 R8.1 41.402,45.466 P1.3@44.958,49.022
ring: J6.1
rst: J7.3 JP2.1 JP2.2 JP3.1 JP3.2 P1.4 R13.1 S2.3 U6.29 U9.1 | length 156.7
  Top Layer w1: JP2.2@43.053,69.723 JP2.1 JP2.1@64.238,69.723 ; JP3.2 JP3.1@122.301,62.357
  Bottom Layer w0.6: U6.29 53.994,63.519
  Bottom Layer w0.7: P1.4@42.418,49.022 42.037,49.022 41.275,49.784 41.275,68.072 JP2.2@43.053,69.85 ; 53.994,63.519 59.563,69.088 77.343,69.088 81.026,65.405 96.774,65.405 100.076,62.103 111.125,62.103 113.665,64.643 U9.1@113.665,70.866
  Bottom Layer w1: S2.3 113.347,78.041 113.665,77.724 U9.1@113.665,70.866 ; JP3.1@122.301,62.357 134.239,62.357 138.557,66.675 J7.3
rx: J8.1 U6.31 U9.21 | length 73.7
  Bottom Layer w0.5: U6.31@55.615,60.903 55.615,60.692 55.598,60.675 55.598,61.44 56.325,62.166
  Bottom Layer w0.62: 56.325,62.166 56.832,62.166
  Bottom Layer w0.7: 56.832,62.166 60.706,66.04 75.692,66.04 81.407,60.325 91.238,60.325 93.524,58.039 102.489,58.039 104.109,59.659 109.505,59.659 111.506,57.658 U9.21@111.506,55.499
  Bottom Layer w1: U9.21@111.506,55.499 111.506,51.308 J8.1
rx2: J8.2 U6.30 U9.22 | length 78.3
  Bottom Layer w0.6: U6.30 54.794,62.23
  Bottom Layer w0.7: 54.864,62.357 59.944,67.437 76.327,67.437 81.661,62.103 91.567,62.103 94.107,59.563 101.981,59.563 103.251,60.833 110.617,60.833 113.538,57.912 113.538,52.959
  Bottom Layer w1: 113.538,52.959 116.713,49.784 J8.2
rxsim: J7.4 JP8.1 JP8.2 U9.7 | length 42.5
  Top Layer w1: JP8.2 JP8.1 JP8.1@122.555,65.532
  Bottom Layer w1: U9.7@101.538,70.381 101.538,65.994 JP8.2 ; JP8.1 124.079,65.532 125.476,64.135 132.842,64.135 136.017,67.31 J7.4
scl: J5.4 U9.20 | length 6.8
  Bottom Layer w1: J5.4@108.585,48.641 108.585,50.292 109.601,51.308 U9.20@109.601,55.004
sda: J5.3 U9.19 | length 6.7
  Bottom Layer w1: J5.3@106.045,48.641 106.045,51.435 107.569,52.959 U9.19@107.569,54.75
spkn: J6.6
spkp: J6.5
txsim: J7.5 JP11.1 JP11.2 U9.6 | length 34.6
  Top Layer w1: JP11.2@104,68.072 104.002,68.072 103.873,67.927 103.999,67.928 JP11.1@122.174,68.072
  Bottom Layer w1: U9.6@103.538,70.381 103.538,68.534 JP11.2@104,68.072 ; JP11.1@122.174,68.072 122.307,68.065 124.714,67.945 126.492,66.167 132.08,66.167 133.477,67.564 J7.5
VCC: D1.2 D2.2 D3.1 D4.2 D5.2 D6.1 D7.1 D8.1 D9.2 D10.1 D11.2 D12.1 D13.2 D14.1 D15.2 D16.1 D17.2 D18.2 D19.1 D20.1 E3.1 J1.1 J1.1A J1.1B JP6.1 JP6.2 K1.5 K2.5 K3.5 K4.5 K5.5 K6.5 K7.5 K8.5 K9.5 K10.5 | length 450.1
  Top Layer w1: JP6.1@74.803,32 JP6.2@74.803,49.53
  Bottom Layer w1: K1.5 D1.2@11.039,30.848 ; D3.1 11.039,32.502 D1.2@11.039,30.848 ; D6.1 8.255,52.578 ; D9.2 28.171,29.845 34.29,29.845 36.703,27.432 36.703,23.241 38.735,21.209 41.656,21.209 43.72,23.273 K7.5 43.72,32.671 D14.1 ; D10.1 27.38,32.587 K5.5 27.38,23.697 25.4,21.717 22.225,21.717 20.193,23.749 20.193,27.813 18.415,29.591 12.296,29.591 D1.2 D1.2@11.039,30.848 ; D8.1 23.114,57.658 22.86,57.658 ; D5.2 33.274,55.499 30.353,58.42 30.353,62.103 28.321,64.135 24.892,64.135 22.86,62.103 K2.5 22.86,57.658 ; D5.2@39.624,55.118 K4.5 ; D13.2 45.316,29.845 51.689,29.845 53.213,28.321 53.086,28.194 53.086,23.114 54.61,21.59 58.293,21.59 60.061,23.358 K9.5 60.061,32.756 D19.1 ; D17.2 61.318,29.845 67.183,29.845 69.215,27.813 69.215,23.622 71.12,21.717 74.803,21.717 76.437,23.351 K8.5 76.437,32.876 D16.1 ; JP6.2 80.645,55.118 88.265,55.118 E3.1 ; D15.2 77.193,29.718 83.693,29.718 85.852,27.559 85.852,23.114 87.63,21.336 90.932,21.336 92.82,23.224 K6.5 92.82,33.003 93.091,33.274 D12.1 ; D11.2 93.576,29.845 99.822,29.845 102.108,27.559 102.108,22.987 103.886,21.209 106.934,21.209 109.203,23.478 K3.5 109.203,33.13 D7.1 ; D4.2 110.721,29.718 116.967,29.718 118.237,28.448 118.364,28.448 118.364,23.622 120.777,21.209 123.825,21.209 125.713,23.097 K10.5 125.713,33.164 D20.1 ; D18.2 127.104,29.718 133.858,29.718 135.001,28.575 135.001,22.987 136.398,21.59 ; 8.255,52.578 8.255,62.23 10.033,64.008 11.557,64.008 13.335,62.23 13.335,58.674 16.51,55.499 D2.2 22.86,56.873 22.86,57.658 ; 8.255,52.578 8.255,33.632 D1.2@11.039,30.848
  Bottom Layer w1.7: 136.398,21.59 139.065,21.59 142.621,25.146 142.621,32.131 144.018,33.528 144.272,33.528 146.431,35.687 146.431,70.612
  Bottom Layer w2: J1.1B@140.716,73.152 143.891,73.152 146.431,70.612
vDD: E2.1 J4.1 J5.1 J7.2 J8.4 JP1.1 JP1.2 JP5.1 JP5.2 JP10.1 JP10.2 U5.3 U6.4 U6.18 | length 182.8
  Top Layer w1: JP5.1@43.053,64.008 JP5.2 JP5.2@64.389,64.008 ; JP1.2 JP1.1@76.073,71.628 ; JP10.2@98.241,52 JP10.1@120.904,52
  Bottom Layer w0.5: E2.1@46.196,54.134 U6.18 52.483,54.134 54.883,56.534 U6.4
  Bottom Layer w0.7: E2.1 E2.1@46.196,54.134
  Bottom Layer w1: JP5.1@42.799,63.5 42.799,56.388 43.987,55.2 E2.1@44.882,56.095 ; JP1.1@76.073,72.39 76.581,71.882 77.597,71.882 81.661,67.818 86.741,67.818 U5.3@88.519,69.596 ; JP1.2@76.2,61.214 JP1.2@76.2,61.722 ; J4.1 84.836,50.546 85.852,51.562 89.662,51.562 93.472,55.372 ; JP10.2 JP10.2@98.241,52 ; J8.4 121.793,56.261 125.984,60.452 135.001,60.452 141.097,66.548 J7.2
  Bottom Layer w1.2: JP5.2@64.262,64.135 73.787,64.135 76.2,61.722 79.978,57.944 90.9,57.944 93.472,55.372 ; 93.726,55.118 95.123,55.118 98.241,52 99.314,50.927 99.314,50.8 J5.1@101.219,48.895
vesp: C1.1 R13.2 T14.1 U5.2 U5.4 U9.3 U9.8 | length 51.2
  Bottom Layer w0.7: U9.8 99.474,65.245 101.346,63.373 107.569,63.373 109.474,65.278 U9.3
  Bottom Layer w1: T14.1@108.204,80.01 T14.1 108.204,75.184 109.474,73.914 U9.3 ; T14.1@108.204,80.137 T14.1@108.839,80.772
  Bottom Layer w1.2: U5.4 U5.2 90.805,72.009 94.107,68.707 C1.1 97.823,68.707 U9.8
pads on no net: J2_1.1 J2_1.2 J2_1.3 J2_1.4 J2_2.1 J2_2.2 J2_2.3 J2_2.4 J2_3.1 J2_3.2 J2_3.3 J2_3.4 J2_4.1 J2_4.2 J2_4.3 J2_4.4 J2_5.1 J2_5.2 J2_5.3 J2_5.4 J3_1.1 J3_1.2 J3_1.3 J3_1.4 J3_2.1 J3_2.2 J3_2.3 J3_2.4 J3_3.1 J3_3.2 J3_3.3 J3_3.4 J3_4.1 J3_4.2 J3_4.3 J3_4.4 J3_5.1 J3_5.2 J3_5.3 J3_5.4 S1.2 S2.4 U6.3 U6.6 U6.19 U6.20 U6.22 U10_1.1 U10_1.2 U10_1.3 U10_1.4 U10_1.5 U10_1.6 U10_1.7 U10_1.8 U10_2.1 U10_2.2 U10_2.3 U10_2.4 U10_2.5 U10_2.6 U10_2.7 U10_2.8 U10_3.1 U10_3.2 U10_3.3 U10_3.4 U10_3.5 U10_3.6 U10_3.7 U10_3.8 U10_4.1 U10_4.2 U10_4.3 U10_4.4 U10_4.5 U10_4.6 U10_4.7 U10_4.8 U10_5.1 U10_5.2 U10_5.3 U10_5.4 U10_5.5 U10_5.6 U10_5.7 U10_5.8
copper on no net: | length 155.4
  Bottom Layer w0.7: 155.067,47.371 157.89,47.371 ; 155.194,21.717 158.017,21.717 ; 155.194,35.052 158.017,35.052 ; 155.194,60.452 158.017,60.452 ; 155.194,73.66 158.017,73.66 ; 155.321,46.101 157.89,46.101 ; 155.448,20.447 158.017,20.447 ; 155.448,33.782 158.017,33.782 ; 155.448,59.182 158.017,59.182 ; 155.448,72.39 158.017,72.39 ; 155.575,42.799 157.607,44.831 ; 155.702,17.145 157.734,19.177 ; 155.702,30.48 157.734,32.512 ; 155.702,55.88 157.734,57.912 ; 155.702,69.088 157.734,71.12 ; 156.112,50.419 157.89,48.641 ; 156.239,24.765 158.017,22.987 ; 156.239,38.1 158.017,36.322 ; 156.239,63.5 158.017,61.722 ; 156.239,76.708 158.017,74.93 ; 164.69,44.831 166.849,42.672 ; 164.69,46.101 167.259,46.101 168.148,45.212 ; 164.69,47.371 167.767,47.371 ; 164.69,48.641 166.341,50.292 ; 164.817,19.177 166.976,17.018 ; 164.817,20.447 167.386,20.447 168.275,19.558 ; 164.817,21.717 167.894,21.717 ; 164.817,22.987 166.468,24.638 ; 164.817,32.512 166.976,30.353 ; 164.817,33.782 167.386,33.782 168.275,32.893 ; 164.817,35.052 167.894,35.052 ; 164.817,36.322 166.468,37.973 ; 164.817,57.912 166.976,55.753 ; 164.817,59.182 167.386,59.182 168.275,58.293 ; 164.817,60.452 167.894,60.452 ; 164.817,61.722 166.468,63.373 ; 164.817,71.12 166.976,68.961 ; 164.817,72.39 167.386,72.39 168.275,71.501 ; 164.817,73.66 167.894,73.66 ; 164.817,74.93 166.468,76.581
  Bottom Layer w1: 154.559,42.799 155.575,42.799 ; 154.559,45.339 155.321,46.101 ; 154.559,47.879 155.067,47.371 ; 154.559,50.419 156.112,50.419 ; 154.686,17.145 155.702,17.145 ; 154.686,19.685 155.448,20.447 ; 154.686,22.225 155.194,21.717 ; 154.686,24.765 156.239,24.765 ; 154.686,30.48 155.702,30.48 ; 154.686,33.02 155.448,33.782 ; 154.686,35.56 155.194,35.052 ; 154.686,38.1 156.239,38.1 ; 154.686,55.88 155.702,55.88 ; 154.686,58.42 155.448,59.182 ; 154.686,60.96 155.194,60.452 ; 154.686,63.5 156.239,63.5 ; 154.686,69.088 155.702,69.088 ; 154.686,71.628 155.448,72.39 ; 154.686,74.168 155.194,73.66 ; 154.686,76.708 156.239,76.708 ; 166.341,50.292 168.148,50.292 ; 166.468,24.638 168.275,24.638 ; 166.468,37.973 168.275,37.973 ; 166.468,63.373 168.275,63.373 ; 166.468,76.581 168.275,76.581 ; 166.849,42.672 168.148,42.672 ; 166.976,17.018 168.275,17.018 ; 166.976,30.353 168.275,30.353 ; 166.976,55.753 168.275,55.753 ; 166.976,68.961 168.275,68.961 ; 167.767,47.371 168.148,47.752 ; 167.894,21.717 168.275,22.098 ; 167.894,35.052 168.275,35.433 ; 167.894,60.452 168.275,60.833 ; 167.894,73.66 168.275,74.041

## Keep-outs
Keep-Out Layer:
  lines w1: 0,-0.381 0,85 150,85 150,0 0,0

## Other copper
Bottom Layer:
  pour cut-out: 8.128,0 8.128,28.705 140.208,27.939 140.208,0
  pour cut-out: 7.239,57.04 7.239,84.955 41.656,84.756 41.656,57.04

## Text inside footprints (layer, text, board x,y; h text height)
D3: Top Overlay "+" at 8.763,33.528 h1.52 r270
D6: Top Overlay "+" at 14.986,52.324 h1.52 r90
D7: Top Overlay "+" at 106.299,33.528 h1.52 r270
D8: Top Overlay "+" at 31.242,52.324 h1.52 r90
D10: Top Overlay "+" at 25.019,33.528 h1.52 r270
D12: Top Overlay "+" at 90.551,33.528 h1.52 r270
D14: Top Overlay "+" at 41.275,33.528 h1.52 r270
D16: Top Overlay "+" at 73.787,33.528 h1.52 r270
D19: Top Overlay "+" at 57.531,33.528 h1.52 r270
D20: Top Overlay "+" at 122.555,33.528 h1.52 r270
J1: Mechanical 1 "Alert PCB fab to slot details" at 146.163,86.462 h0.3 r270; Mechanical 1 "Assign keep-out area to slot" at 146.663,86.462 h0.3 r270; Mechanical 1 "Mech 1 - Slot cut-out" at 145.663,86.462 h0.3 r270; Mechanical 1 "Mech 2 - Clearance, move to internal plane if present" at 145.163,86.462 h0.3 r270
T1: Top Overlay "1 2 3" at 11.557,-10.668 h2.5
T2: Top Overlay "1 2 3" at 22.613,96.329 h2.5 r180
T3: Top Overlay "1 2 3" at 109.497,-10.604 h2.5
T4: Top Overlay "1 2 3" at 39.33,96.329 h2.5 r180
T5: Top Overlay "1 2 3" at 27.892,-10.604 h2.5
T6: Top Overlay "1 2 3" at 93.147,-10.604 h2.5
T7: Top Overlay "1 2 3" at 44.29,-10.604 h2.5
T8: Top Overlay "1 2 3" at 76.891,-10.731 h2.5
T9: Top Overlay "1 2 3 4" at 65.184,96.456 h2.5 r180
T10: Top Overlay "1 2 3" at 80.344,96.329 h2.5 r180
T11: Top Overlay "1 2 3" at 60.689,-10.604 h2.5
T12: Top Overlay "1 2 3" at 126.214,-10.477 h2.5
T13: Top Overlay "1 2 3" at 95.711,96.329 h2.5 r180
T14: Top Overlay "1 2" at 108.745,96.52 h2.5 r180
U1: Top Overlay "1" at 26.05,32.389 h1.5 r90; Top Overlay "2" at 26.05,34.679 h1.5 r90; Top Overlay "3" at 26.05,37.219 h1.5 r90
U2: Top Overlay "1" at 124.675,32.389 h1.5 r90; Top Overlay "2" at 124.675,34.679 h1.5 r90; Top Overlay "3" at 124.675,37.219 h1.5 r90
U3: Top Overlay "3" at 19.67,48.379 h1.5 r270; Top Overlay "2" at 19.67,50.919 h1.5 r270; Top Overlay "1" at 19.67,53.209 h1.5 r270
U4: Top Overlay "3" at 34.529,48.252 h1.5 r270; Top Overlay "2" at 34.529,50.792 h1.5 r270; Top Overlay "1" at 34.529,53.082 h1.5 r270
U7: Top Overlay "1" at 42.487,32.389 h1.5 r90; Top Overlay "2" at 42.487,34.679 h1.5 r90; Top Overlay "3" at 42.487,37.219 h1.5 r90
U8: Top Overlay "1" at 108.237,32.389 h1.5 r90; Top Overlay "2" at 108.237,34.679 h1.5 r90; Top Overlay "3" at 108.237,37.219 h1.5 r90
U9: Mechanical 13 "ANTENNA AREA" at 121.348,70.606 h0.25 r270; Mechanical 13 "CUTOUT POLYGON" at 120.84,70.606 h0.25 r270
U11: Top Overlay "1" at 58.925,32.389 h1.5 r90; Top Overlay "2" at 58.925,34.679 h1.5 r90; Top Overlay "3" at 58.925,37.219 h1.5 r90
U12: Top Overlay "1" at 91.455,32.389 h1.5 r90; Top Overlay "2" at 91.455,34.679 h1.5 r90; Top Overlay "3" at 91.455,37.219 h1.5 r90
U13: Top Overlay "1" at 141.112,32.389 h1.5 r90; Top Overlay "2" at 141.112,34.679 h1.5 r90; Top Overlay "3" at 141.112,37.219 h1.5 r90
U14: Top Overlay "1" at 75.362,32.389 h1.5 r90; Top Overlay "2" at 75.362,34.679 h1.5 r90; Top Overlay "3" at 75.362,37.219 h1.5 r90